# Altium PCB PCB.PcbDoc (part 2 of 6)
Units mm, origin at the board's own origin, x right, y up, seen from the top; angles counter-clockwise.
Board outline 56.61 x 57.68 mm, 2 copper layers (Top Layer, Bottom Layer), stack 0.572 mm thick; 104 components, 100 nets, 551 pads, 332 vias.
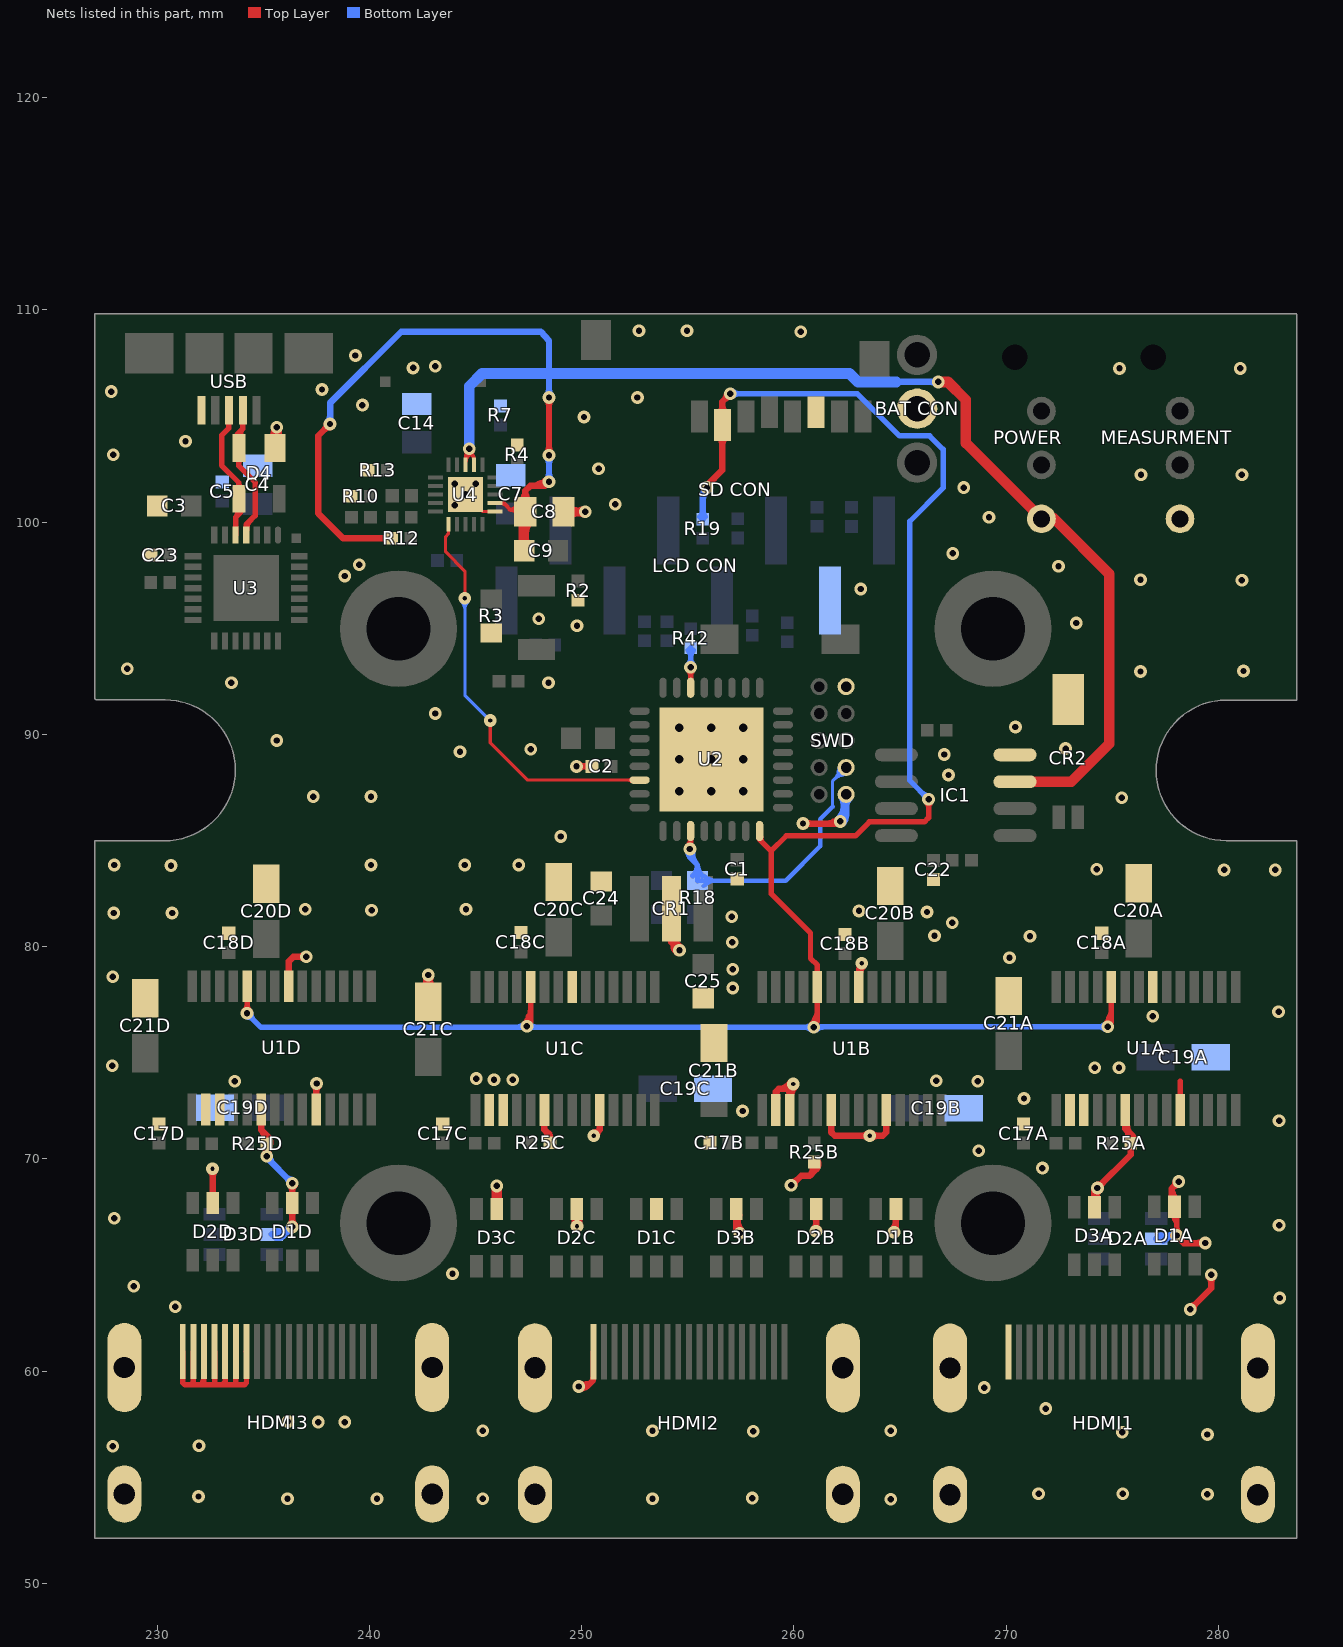
[diagram p2: the nets of this part, all layers, seen from the top]

## Via types
v1: diameter 0.6, hole 0.3, Top Layer to Bottom Layer, tented both sides, 242 vias
v2: diameter 0.6, hole 0.2, Top Layer to Bottom Layer, tented both sides, 80 vias
v3: diameter 0.8, hole 0.4, Top Layer to Bottom Layer, tented both sides, 9 vias
v4: diameter 0.66, hole 0.33, Top Layer to Bottom Layer, tented both sides, 1 vias

## Nets (pads, with @x,y where several pads share a name; then routed paths per layer and width w, separated by ;. In a path a pad name is that pad's centre, name@x,y a point inside that pad or via, vN(x,y) a via of type N, cw(c..) or ccw(c..) an arc to the next point about the centre after c; other vN are vias at no path point) (continued)
BAT: C8.1 C9.1 IC1.3 POWER.2 R12.1 U4.2 U4.7 U4.8 | length 113.4
  Top Layer w0.152: U4.8@244.525,102.7 244.525,103.124 ; 244.891,103.06 ccw(c245.026,103.074) U4.7@244.94,102.968 ; U4.7@244.925,102.7 244.925,103.08 ; 244.525,103.124 ccw(c244.428,103.221) 244.533,103.309 cw(c244.428,103.221) 244.525,103.124 ; 244.525,103.124 244.577,103.175 ; v1@244.525,103.319 cw(c244.375,103.204) 244.539,103.109 ; v1@244.525,103.319 cw(c244.375,103.204) 244.539,103.109 ; v1@244.525,103.319 cw(c244.375,103.204) 244.539,103.109 ; 244.539,103.109 cw(c244.753,102.985) v1@244.727,103.232 ; 244.539,103.109 cw(c244.753,102.985) v1@244.727,103.232 ; 244.539,103.109 cw(c244.753,102.985) v1@244.727,103.232 ; 244.577,103.175 ccw(c244.703,103.048) 244.546,102.961 cw(c244.703,103.048) 244.577,103.175 ; 244.577,103.175 244.831,103.175 ; v1@244.663,103.234 cw(c244.604,102.911) 244.888,103.075 ; v1@244.663,103.234 cw(c244.604,102.911) 244.888,103.075 ; v1@244.663,103.234 cw(c244.604,102.911) 244.888,103.075 ; 244.831,103.175 cw(c244.65,102.995) 244.902,102.954 ccw(c244.65,102.995) 244.831,103.175 ; 244.831,103.175 244.925,103.08 ; 244.888,103.075 cw(c245.105,103.201) v1@244.893,103.335 ; 244.888,103.075 cw(c245.105,103.201) v1@244.893,103.335 ; 244.888,103.075 cw(c245.105,103.201) v1@244.893,103.335 ; 244.925,103.08 cw(c245.074,103.228) 244.895,103.338 ccw(c245.074,103.228) 244.925,103.08 ; U4.8@244.525,102.679 cw(c245.25,102.679) 244.832,103.271 ccw(c245.25,102.679) U4.8@244.525,102.679 ; U4.8@244.525,102.973 cw(c245.043,102.973) 244.745,103.396 ccw(c245.043,102.973) U4.8@244.525,102.973
  Top Layer w0.2: U4.2@245.925,100.9 246.332,100.9 246.528,100.705 246.528,100.69 246.634,100.584 ; C8.1@247.345,100.482 247.244,100.584 246.634,100.584 ; 246.634,100.584 ccw(c246.634,100.916) 246.946,100.802 cw(c246.634,100.916) 246.634,100.584 ; 246.634,100.584 cw(c246.634,100.114) 247.008,100.399 ccw(c246.634,100.114) 246.634,100.584 ; U4.2@246.175,100.9 cw(c246.175,100.521) 246.443,100.789 ccw(c246.175,100.521) U4.2@246.175,100.9
  Top Layer w0.203: 244.577,103.175 244.653,103.251 244.653,103.403 v1(244.704,103.454)
  Top Layer w0.305: v1(238.15,104.623) 237.592,104.064 237.592,100.406 238.76,99.238 R12.1@241.053,99.238 ; C8.1@247.345,100.482 247.345,101.473 ; 247.959,101.779 cw(c248.173,101.408) v1@248.388,101.777 ; v1(248.463,101.905) 248.26,101.702 247.574,101.702 247.345,101.473 ; v1(248.463,103.149) v1(248.463,105.867) ; 237.898,104.371 ccw(c237.646,104.623) 238.003,104.623 cw(c237.646,104.623) 237.898,104.371 ; 237.898,104.371 cw(c238.15,104.119) 238.15,104.475 ccw(c238.15,104.119) 237.898,104.371 ; 240.697,99.238 ccw(c240.697,99.594) 240.949,99.342 cw(c240.697,99.594) 240.697,99.238 ; 240.697,99.238 cw(c240.697,98.881) 240.949,99.133 ccw(c240.697,98.881) 240.697,99.238 ; 247.345,101.473 ccw(c248.051,101.473) 247.589,100.939 cw(c248.051,101.473) 247.345,101.473 ; 247.345,101.473 cw(c246.639,101.473) 247.101,100.939 ccw(c246.639,101.473) 247.345,101.473 ; 248.463,103.506 ccw(c248.819,103.506) 248.567,103.254 cw(c248.819,103.506) 248.463,103.506 ; 248.463,103.506 cw(c248.106,103.506) 248.358,103.254 ccw(c248.106,103.506) 248.463,103.506 ; 248.463,105.511 ccw(c248.106,105.511) 248.358,105.763 cw(c248.106,105.511) 248.463,105.511 ; 248.463,105.511 cw(c248.819,105.511) 248.567,105.763 ccw(c248.819,105.511) 248.463,105.511 ; 247.616,101.702 ccw(c247.616,102.752) 248.358,102.009 cw(c247.616,102.752) 247.616,101.702
  Top Layer w0.508: C9.1@247.269,98.844 C8.1@247.269,100.482 ; v1(266.802,106.604) 267.259,106.604 268.097,105.766 268.097,103.733 271.65,100.18 272.235,100.18 274.853,97.561 274.853,89.56 273.063,87.77 IC1.3@270.413,87.77 ; 247.269,99.273 ccw(c247.889,99.273) 247.451,98.835 cw(c247.889,99.273) 247.269,99.273 ; 247.269,99.469 cw(c248.183,99.469) 247.537,100.116 ccw(c248.183,99.469) 247.269,99.469
  Bottom Layer w0.305: v1(238.15,104.623) 238.15,105.613 241.503,108.966 248.082,108.966 248.463,108.534 248.463,107.005 v1(248.463,105.867) ; v1(248.463,101.905) v1(248.463,103.149) ; 264.82,106.604 v1(266.802,106.604) ; 238.15,104.979 ccw(c238.507,104.979) 238.255,104.727 cw(c238.507,104.979) 238.15,104.979 ; 238.15,104.979 cw(c237.794,104.979) 238.046,104.727 ccw(c237.794,104.979) 238.15,104.979 ; 248.463,102.261 ccw(c248.819,102.261) 248.567,102.009 cw(c248.819,102.261) 248.463,102.261 ; 248.463,102.261 cw(c248.106,102.261) 248.358,102.009 ccw(c248.106,102.261) 248.463,102.261 ; 248.463,102.793 ccw(c248.106,102.793) 248.358,103.045 cw(c248.106,102.793) 248.463,102.793 ; 248.463,102.793 cw(c248.819,102.793) 248.567,103.045 ccw(c248.819,102.793) 248.463,102.793 ; 248.463,106.224 ccw(c248.819,106.224) 248.567,105.972 cw(c248.819,106.224) 248.463,106.224 ; 248.463,106.224 cw(c248.106,106.224) 248.358,105.972 ccw(c248.106,106.224) 248.463,106.224 ; 266.445,106.604 ccw(c266.445,106.96) 266.697,106.708 cw(c266.445,106.96) 266.445,106.604 ; 266.445,106.604 cw(c266.445,106.247) 266.697,106.499 ccw(c266.445,106.247) 266.445,106.604
  Bottom Layer w0.508: v1(244.704,103.454) 244.704,106.401 245.308,107.005 248.463,107.005 262.615,107.005 263.017,106.604 264.82,106.604
BOOT_SEL: R18.2 SWD.8 U2.3 | length 29.4
  Top Layer w0.254: v1(255.099,84.6) 255.099,84.665 255.133,84.699 U2.3@255.133,85.449 ; v1@254.977,84.722 ccw(c254.6,85.099) 255.133,85.099 cw(c254.6,85.099) v1@254.977,84.722 ; 255.133,84.936 ccw(c255.436,84.936) 255.222,84.722 cw(c255.436,84.936) 255.133,84.936
  Bottom Layer w0.152: 261.823,86.589 261.823,87.808 SWD.8@262.458,88.443 ; 262.017,88.005 cw(c262.579,87.855) SWD.8@262.462,88.424 ; 262.021,88.002 ccw(c261.87,88.563) SWD.8@262.44,88.447 ; 262.081,88.243 cw(c262.523,88.125) SWD.8@262.431,88.573 ; 262.259,88.066 ccw(c262.14,88.508) SWD.8@262.589,88.416 ; 261.905,87.89 ccw(c261.353,88.443) 262.134,88.443 cw(c261.353,88.443) 261.905,87.89 ; 261.905,87.89 cw(c262.458,87.337) 262.458,88.119 ccw(c262.458,87.337) 261.905,87.89 ; 262.166,88.15 ccw(c261.873,88.443) 262.287,88.443 cw(c261.873,88.443) 262.166,88.15 ; 262.166,88.15 cw(c262.458,87.858) 262.458,88.271 ccw(c262.458,87.858) 262.166,88.15
  Bottom Layer w0.203: R18.2@255.46,83.11 259.41,83.11 ; 259.513,83.11 259.41,83.11 ; 261.823,86.589 261.234,86 261.234,84.73 259.614,83.11 259.41,83.11 ; 256.351,83.11 ccw(c256.351,82.268) 255.756,82.863 cw(c256.351,82.268) 256.351,83.11 ; 256.351,83.11 cw(c256.351,83.951) 255.756,83.356 ccw(c256.351,83.951) 256.351,83.11
  Bottom Layer w0.254: v1(255.099,84.6) 255.099,84.665 255.118,84.684 255.118,84.188 ; R18.2@255.46,83.11 255.46,83.845 ; 255.118,84.187 ccw(c254.75,84.187) 254.988,84.468 cw(c254.75,84.187) 255.118,84.187 ; 255.118,84.188 255.46,83.845 ; 255.46,83.845 ccw(c256.136,83.845) 255.678,83.347 cw(c256.136,83.845) 255.46,83.845 ; 255.46,83.845 cw(c254.783,83.845) 255.241,83.347 ccw(c254.783,83.845) 255.46,83.845 ; 255.46,83.845 cw(c255.983,84.369) 255.267,84.556 ccw(c255.983,84.369) 255.46,83.845 ; v1@255.021,84.62 ccw(c255.486,84.499) 255.146,84.159 cw(c255.486,84.499) v1@255.021,84.62 ; 255.118,84.226 cw(c255.473,84.226) 255.222,84.478 ccw(c255.473,84.226) 255.118,84.226
CS: "SD CON.2" R19.2 U1A.24 U1B.24 U1C.24 U1D.24 U2.8 | length 133.4
  Top Layer w0.254: v1@234.25,76.849 U1D.24@234.25,78.139 ; v1(247.421,76.251) 247.6,76.43 U1C.24@247.6,78.1 ; 247.517,76.751 ccw(c247.809,76.582) v1@247.553,76.363 ; U2.8@258.359,85.107 cw(c258.222,84.87) 258.487,84.941 ; U2.8@258.383,85.449 258.383,85.05 258.928,84.506 ; v1(260.934,76.2) 260.934,76.378 261.1,76.544 ; 261.019,76.68 ccw(c261.283,76.528) v1@261.06,76.318 ; 266.319,86.055 266.141,85.877 263.55,85.877 262.89,85.217 259.639,85.217 258.928,84.506 ; 266.344,86.081 v1(266.344,86.944) ; v1(274.777,76.225) 274.956,76.429 U1A.24@274.956,78.109 ; 274.872,76.724 ccw(c275.163,76.557) v1@274.908,76.338 ; 234.25,77.378 ccw(c234.014,77.378) 234.181,77.545 cw(c234.014,77.378) 234.25,77.378 ; 234.25,77.378 cw(c234.487,77.378) 234.32,77.545 ccw(c234.487,77.378) 234.25,77.378 ; 247.6,77.338 ccw(c247.364,77.338) 247.531,77.506 cw(c247.364,77.338) 247.6,77.338 ; 247.6,77.338 cw(c247.837,77.338) 247.67,77.506 ccw(c247.837,77.338) 247.6,77.338 ; 258.928,84.506 258.928,82.499 260.782,80.645 260.782,79.451 261.1,79.133 U1B.24@261.1,78.1 261.1,76.544 ; 261.1,76.544 ccw(c261.238,76.407) 261.077,76.297 cw(c261.238,76.407) 261.1,76.544 ; 261.1,76.544 cw(c260.929,76.544) 260.932,76.373 ccw(c260.929,76.544) 261.1,76.544 ; 261.1,77.338 ccw(c260.864,77.338) 261.031,77.506 cw(c260.864,77.338) 261.1,77.338 ; 261.1,77.338 cw(c261.337,77.338) 261.17,77.506 ccw(c261.337,77.338) 261.1,77.338 ; 261.1,78.862 ccw(c261.337,78.862) 261.17,78.694 cw(c261.337,78.862) 261.1,78.862 ; 261.1,78.862 cw(c260.864,78.862) 261.031,78.694 ccw(c260.864,78.862) 261.1,78.862 ; 266.344,86.527 ccw(c265.927,86.527) 266.222,86.822 cw(c265.927,86.527) 266.344,86.527 ; 266.344,86.527 cw(c266.762,86.527) 266.467,86.822 ccw(c266.762,86.527) 266.344,86.527 ; 274.956,77.348 ccw(c274.719,77.348) 274.886,77.515 cw(c274.719,77.348) 274.956,77.348 ; 274.956,77.348 cw(c275.192,77.348) 275.025,77.515 ccw(c275.192,77.348) 274.956,77.348 ; v1@234.116,76.983 ccw(c233.793,77.306) 234.25,77.306 cw(c233.793,77.306) v1@234.116,76.983 ; 234.25,77.25 ccw(c234.628,77.25) 234.361,76.983 cw(c234.628,77.25) 234.25,77.25 ; v1@247.299,76.373 ccw(c246.572,77.101) 247.6,77.101 cw(c246.572,77.101) v1@247.299,76.373 ; U2.8@258.431,85.149 ccw(c258.785,85.149) 258.535,84.899 cw(c258.785,85.149) U2.8@258.431,85.149 ; v1@260.812,76.322 ccw(c260.115,77.019) 261.1,77.019 cw(c260.115,77.019) v1@260.812,76.322 ; v1@274.655,76.348 ccw(c273.929,77.074) 274.956,77.074 cw(c273.929,77.074) v1@274.655,76.348
  Top Layer w0.305: v1(255.905,101.625) 255.905,101.727 256.616,102.438 256.616,104.445 256.625,104.454 256.625,105.673 v1(256.997,106.045) ; 256.745,105.793 ccw(c256.493,106.045) 256.85,106.045 cw(c256.493,106.045) 256.745,105.793 ; 256.745,105.793 cw(c256.997,105.541) 256.997,105.897 ccw(c256.997,105.541) 256.745,105.793 ; 256.469,104.053 cw(c256.112,103.697) 256.616,103.697 ccw(c256.112,103.697) 256.469,104.053 ; 256.469,105.103 ccw(c256.09,105.482) 256.625,105.482 cw(c256.09,105.482) 256.469,105.103 ; 256.616,103.564 cw(c257.308,103.564) 256.819,104.053 ccw(c257.308,103.564) 256.616,103.564 ; 256.625,105.57 ccw(c257.285,105.57) 256.819,105.103 cw(c257.285,105.57) 256.625,105.57
  Bottom Layer w0.254: v1(234.239,76.86) 234.899,76.2 247.371,76.2 v1@247.391,76.221 ; v1(247.421,76.251) 247.472,76.2 v1(260.934,76.2) ; v1(256.997,106.045) 262.992,106.045 264.973,104.064 266.395,104.064 267.029,103.43 267.029,101.607 265.455,100.033 265.455,87.833 v1(266.344,86.944) ; v1@260.934,76.221 274.269,76.221 ; 274.117,76.221 274.772,76.221 v1(274.777,76.225) ; 234.534,76.565 ccw(c234.239,76.27) 234.239,76.687 cw(c234.239,76.27) 234.534,76.565 ; 234.534,76.565 cw(c234.829,76.86) 234.412,76.86 ccw(c234.829,76.86) 234.534,76.565 ; 257.415,106.045 ccw(c257.415,105.627) 257.12,105.923 cw(c257.415,105.627) 257.415,106.045 ; 257.415,106.045 cw(c257.415,106.463) 257.12,106.167 ccw(c257.415,106.463) 257.415,106.045 ; 260.517,76.2 ccw(c260.517,76.618) 260.812,76.322 cw(c260.517,76.618) 260.517,76.2 ; 260.517,76.2 cw(c260.517,75.782) 260.812,76.078 ccw(c260.517,75.782) 260.517,76.2 ; 266.049,87.24 ccw(c266.344,87.535) 266.344,87.117 cw(c266.344,87.535) 266.049,87.24 ; 266.049,87.24 cw(c265.754,86.944) 266.171,86.944 ccw(c265.754,86.944) 266.049,87.24 ; 246.881,76.2 ccw(c246.881,76.791) 247.299,76.373 cw(c246.881,76.791) 246.881,76.2 ; v1@247.544,76.373 ccw(c247.962,76.791) 247.962,76.2 cw(c247.962,76.791) v1@247.544,76.373 ; v1@261.057,76.078 cw(c261.402,75.733) 261.402,76.221 ccw(c261.402,75.733) v1@261.057,76.078 ; v1@261.057,76.322 ccw(c261.302,76.568) 261.302,76.221 cw(c261.302,76.568) v1@261.057,76.322 ; 274.348,76.221 ccw(c274.348,76.655) 274.655,76.348 cw(c274.348,76.655) 274.348,76.221 ; 274.371,76.221 cw(c274.371,75.819) 274.655,76.103 ccw(c274.371,75.819) 274.371,76.221
  Bottom Layer w0.305: R19.2@255.7,100.14 R19.2@255.702,100.138 255.702,101.166 ; 255.7,101.016 255.7,101.319 ; 255.778,101.275 ccw(c255.629,101.411) v1@255.788,101.535 ; v1(255.905,101.625) 255.905,101.524 255.7,101.319 ; 255.7,101.319 ccw(c255.516,101.503) 255.764,101.581 cw(c255.516,101.503) 255.7,101.319 ; 255.702,100.494 ccw(c256.058,100.494) 255.806,100.242 cw(c256.058,100.494) 255.702,100.494 ; 255.702,100.494 cw(c255.345,100.494) 255.597,100.242 ccw(c255.345,100.494) 255.702,100.494 ; 255.7,100.982 cw(c256.315,100.982) 255.984,101.501 ccw(c256.315,100.982) 255.7,100.982 ; 255.7,101.257 cw(c255.922,101.257) 255.912,101.478 ccw(c255.922,101.257) 255.7,101.257
D/C: R42.1 U2.22 | length 8.3
  Top Layer w0.254: U2.22@255.133,92.199 255.133,93.04 v1(255.133,93.163) ; 255.133,92.745 ccw(c254.716,92.745) 255.011,93.04 cw(c254.716,92.745) 255.133,92.745 ; 255.133,92.745 cw(c255.551,92.745) 255.256,93.04 ccw(c255.551,92.745) 255.133,92.745
  Bottom Layer w0.254: v1(255.133,93.163) 255.133,93.665 ; R42.1@255.143,94.082 255.143,93.675 ; R42.1@255.021,93.959 cw(c254.749,93.688) 255.133,93.688 ; R42.1@255.021,93.959 cw(c254.749,93.688) 255.133,93.688 ; R42.1@255.021,93.959 cw(c254.749,93.688) 255.133,93.688 ; R42.1@255.021,93.959 cw(c254.749,93.688) 255.133,93.688 ; 255.133,93.58 ccw(c255.551,93.58) 255.256,93.285 cw(c255.551,93.58) 255.133,93.58 ; 255.133,93.58 cw(c254.716,93.58) 255.011,93.285 ccw(c254.716,93.58) 255.133,93.58 ; 255.133,93.665 cw(c255.526,93.665) 255.26,93.954 ccw(c255.526,93.665) 255.133,93.665 ; 255.133,93.665 255.143,93.675 ; 255.143,93.675 ccw(c254.752,93.675) 255.023,93.957 cw(c254.752,93.675) 255.143,93.675 ; 255.143,93.675 cw(c255.534,93.675) 255.263,93.957 ccw(c255.534,93.675) 255.143,93.675 ; 255.133,93.64 cw(c255.584,93.64) 255.265,93.959 ccw(c255.584,93.64) 255.133,93.64
DM: D4.3 U3.5 USB.3 | length 10.4
  Top Layer w0.254: USB.3@233.38,105.264 233.38,104.424 233.045,104.089 233.045,102.667 233.858,101.854 ; U3.5@233.699,99.389 233.701,99.391 233.701,100.224 ; 233.701,100.224 ccw(c233.483,100.441) 233.723,100.634 cw(c233.483,100.441) 233.701,100.224 ; 233.701,100.224 233.858,100.381 ; 233.858,100.381 ccw(c233.567,100.381) 233.749,100.607 cw(c233.567,100.381) 233.858,100.381 ; 233.858,100.381 cw(c234.148,100.381) 233.966,100.607 ccw(c234.148,100.381) 233.858,100.381 ; 233.858,100.381 D4.3@233.858,101.092 233.858,101.854 ; 233.858,101.854 ccw(c234.262,101.854) 233.979,101.566 cw(c234.262,101.854) 233.858,101.854 ; 233.858,101.854 cw(c233.454,101.854) 233.737,101.566 ccw(c233.454,101.854) 233.858,101.854 ; 233.901,100.424 ccw(c233.705,100.619) 233.921,100.793 cw(c233.705,100.619) 233.901,100.424
DP: D4.2 U3.4 USB.2 | length 11.7
  Top Layer w0.254: USB.2@234.041,105.275 234.036,105.269 234.036,104.394 ; U3.4@234.199,99.389 234.199,99.883 234.62,100.305 234.62,101.879 233.858,102.641 D4.2@233.858,103.492 233.858,104.216 ; 233.858,102.724 ccw(c233.44,102.724) 233.735,103.02 cw(c233.44,102.724) 233.858,102.724 ; 233.858,102.724 cw(c234.275,102.724) 233.98,103.02 ccw(c234.275,102.724) 233.858,102.724 ; 233.858,104.216 ccw(c234.176,104.216) 233.97,103.974 cw(c234.176,104.216) 233.858,104.216 ; 233.858,104.216 cw(c233.54,104.216) 233.746,103.974 ccw(c233.54,104.216) 233.858,104.216 ; 233.858,104.216 234.036,104.394 ; 234.036,104.394 ccw(c234.283,104.146) 233.998,103.943 cw(c234.283,104.146) 234.036,104.394 ; D4.2@233.792,103.795 cw(c234.036,103.97) 233.824,104.182 ccw(c234.036,103.97) D4.2@233.792,103.795 ; U3.4@234.222,99.639 cw(c234.867,99.639) 234.411,100.095 ccw(c234.867,99.639) U3.4@234.222,99.639
GND: "BAT CON.2" "LCD CON.2" "SD CON.6" C1.1 C2.1 C3.2 C4.1 C5.2 C7.2 C8.2 C14.2 C17A.1 C17B.1 C17C.1 C17D.1 C18A.1 C18B.1 C18C.1 C18D.1 C19A.2 C19B.2 C19C.2 C19D.2 C20A.2 C20B.2 C20C.2 C20D.2 C21A.2 C21B.2 C21C.2 C21D.2 C22.2 C23.2 C24.1 C25.1 CR1.2 CR2.3 D1A.2 D1B.2 D1C.2 D1D.2 D2A.2 D2B.2 D2C.2 D2D.2 D3A.2 D3B.2 D3C.2 D3D.2 D4.1 HDMI1.19 HDMI1.20 HDMI1.21 HDMI1.22 HDMI1.23 HDMI2.19 HDMI2.20 HDMI2.21 HDMI2.22 HDMI2.23 HDMI3.13 HDMI3.14 HDMI3.15 HDMI3.16 HDMI3.17 HDMI3.18 HDMI3.19 HDMI3.20 HDMI3.21 HDMI3.22 HDMI3.23 IC1.4 MEASURMENT.2 R2.1 R3.1 R4.1 R7.1 R10.2 R13.1 R25A.1 R25B.1 R25C.1 R25D.1 SWD.2 SWD.10 U1A.2 U1A.3 U1A.6 U1A.10 U1A.21 U1B.2 U1B.3 U1B.6 U1B.10 U1B.21 U1C.2 U1C.3 U1C.6 U1C.10 U1C.21 U1D.2 U1D.3 U1D.6 U1D.10 U1D.21 U2.33 U4.1 U4.21 USB.5 | length 223.8
  Top Layer w0.152: U4.21@244.475,101.29 ccw(c244.87,101.37) U4.21@244.765,100.982 ; v4(244.525,101.3) 245.325,100.5 U4.1@245.925,100.5 ; U4.21@244.536,101.35 cw(c244.455,100.956) U4.21@244.844,101.06 ; U4.21@244.959,100.867 ccw(c244.525,100.433) 244.525,101.046 cw(c244.525,100.433) U4.21@244.959,100.867 ; U4.21@244.959,100.867 cw(c245.392,101.3) 244.779,101.3 ccw(c245.392,101.3) U4.21@244.959,100.867
  Top Layer w0.2: U1B.6@261.75,72.139 U1B.6@261.75,72.3
  Top Layer w0.254: HDMI3.19@231.211,60.935 231.211,59.467 231.318,59.36 231.572,59.36 ; HDMI3.18@231.711,60.935 231.711,59.499 231.572,59.36 ; HDMI3.17@232.211,60.935 232.211,59.516 232.054,59.36 ; HDMI3.16@232.711,60.935 232.715,60.93 232.715,59.436 232.639,59.36 ; HDMI3.15@233.223,60.922 HDMI3.15@233.211,60.935 233.211,59.5 233.07,59.36 ; 233.711,59.416 HDMI3.14@233.711,60.935 ; HDMI3.13@234.211,60.935 234.213,60.932 234.213,59.461 234.112,59.36 233.07,59.36 ; C8.2@249.145,100.482 v1(250.165,100.482) ; v1(249.86,59.284) 250.266,59.284 ; HDMI2.19@250.552,60.924 250.552,59.57 ; U1B.21@263.001,78.71 ccw(c262.809,79.044) v2@263.181,78.944 ; U1B.21@263.05,78.1 263.05,78.951 263.246,79.146 263.195,79.197 v2(263.195,79.223) ; v2@263.078,79.095 cw(c262.936,78.94) U1B.21@263.118,78.835 ; v2@263.079,79.094 cw(c262.908,78.904) U1B.21@263.13,78.776 ; 277.954,67.139 cw(c278.102,67.225) D1A.2@278.015,67.372 ; v1@278.028,66.4 D1A.2@278.028,67.644 ; U1A.10@278.206,72.309 278.206,73.659 ; 231.572,59.36 232.054,59.36 ; 232.054,59.36 ccw(c231.7,59.714) 232.198,59.773 cw(c231.7,59.714) 232.054,59.36 ; 232.054,59.36 232.639,59.36 ; 232.639,59.36 233.07,59.36 ; 249.722,100.379 cw(c249.843,99.926) v1@250.078,100.333 ; 249.722,100.379 cw(c249.843,99.926) v1@250.078,100.333 ; 249.722,100.379 cw(c249.843,99.926) v1@250.078,100.333 ; 249.722,100.585 ccw(c249.843,101.039) v1@250.078,100.632 ; 249.722,100.585 ccw(c249.843,101.039) v1@250.078,100.632 ; 249.722,100.585 ccw(c249.843,101.039) v1@250.078,100.632 ; 249.747,100.482 ccw(c249.747,100.9) 250.042,100.605 cw(c249.747,100.9) 249.747,100.482 ; 249.747,100.482 cw(c249.747,100.065) 250.042,100.36 ccw(c249.747,100.065) 249.747,100.482 ; 249.793,100.398 ccw(c249.698,100.752) v1@250.015,100.569 ; 249.793,100.398 ccw(c249.698,100.752) v1@250.015,100.569 ; 249.793,100.398 ccw(c249.698,100.752) v1@250.015,100.569 ; 249.793,100.566 cw(c249.698,100.213) v1@250.015,100.396 ; 249.793,100.566 cw(c249.698,100.213) v1@250.015,100.396 ; 249.793,100.566 cw(c249.698,100.213) v1@250.015,100.396 ; v1@250.106,100.482 ccw(c250.106,99.522) 249.427,100.201 cw(c250.106,99.522) v1@250.106,100.482 ; v1@250.106,100.482 cw(c250.106,101.443) 249.427,100.764 ccw(c250.106,101.443) v1@250.106,100.482 ; 250.266,59.284 ccw(c250.266,58.893) 249.984,59.164 cw(c250.266,58.893) 250.266,59.284 ; 250.266,59.284 cw(c250.266,59.674) 249.984,59.404 ccw(c250.266,59.674) 250.266,59.284 ; 250.266,59.284 250.552,59.57 ; 250.552,59.57 cw(c250.144,59.978) 249.925,59.444 ccw(c250.144,59.978) 250.552,59.57 ; 263.05,78.862 ccw(c263.287,78.862) 263.12,78.694 cw(c263.287,78.862) 263.05,78.862 ; 263.05,78.862 cw(c262.814,78.862) 262.981,78.694 ccw(c262.814,78.862) 263.05,78.862 ; 278.028,66.813 ccw(c278.446,66.813) 278.151,66.518 cw(c278.446,66.813) 278.028,66.813 ; 278.028,66.813 cw(c277.611,66.813) 277.906,66.518 ccw(c277.611,66.813) 278.028,66.813 ; 278.206,73.071 ccw(c278.442,73.071) 278.275,72.904 cw(c278.442,73.071) 278.206,73.071 ; 278.206,73.071 cw(c277.969,73.071) 278.136,72.904 ccw(c277.969,73.071) 278.206,73.071 ; v1@249.829,59.209 ccw(c249.987,59.595) 250.282,59.3 cw(c249.987,59.595) v1@249.829,59.209 ; 250.393,59.411 ccw(c250.04,59.764) 250.539,59.764 cw(c250.04,59.764) 250.393,59.411 ; U1B.21@263.05,78.456 cw(c263.961,78.456) 263.317,79.1 ccw(c263.961,78.456) U1B.21@263.05,78.456 ; D1A.2@277.804,67.398 cw(c277.264,66.858) 278.028,66.858 ccw(c277.264,66.858) D1A.2@277.804,67.398
  Top Layer w0.305: v2(232.613,69.545) 232.639,69.52 232.639,69.291 232.628,69.281 D2D.2@232.628,67.927 ; U1D.6@234.9,72.339 234.9,71.373 ; v1@235.068,70.241 ccw(c234.847,70.498) R25D.1@235.185,70.498 ; R25D.1@235.077,70.595 cw(c234.972,70.452) v1@235.143,70.406 ; R25D.1@235.139,70.714 235.139,71.134 234.9,71.373 ; R25D.1@235.143,70.434 cw(c234.859,70.434) v1@235.06,70.234 ; R25D.1@235.143,70.498 ccw(c235.482,70.498) v1@235.261,70.241 ; v1(235.164,70.129) v1@235.164,70.307 ; v1@235.164,70.144 v1@235.164,70.307 ; R25D.1@235.164,70.714 v1@235.164,70.307 ; v1@235.185,70.406 cw(c235.356,70.452) R25D.1@235.252,70.595 ; R25D.1@235.185,70.434 ccw(c235.469,70.434) v1@235.269,70.234 ; U1D.21@236.2,78.139 236.2,79.305 236.423,79.527 v1(237.033,79.527) ; v1(236.372,66.802) D1D.2@236.372,67.644 ; D1D.2@236.372,67.923 v1(236.372,68.859) ; U1D.10@237.5,72.339 237.5,73.467 237.515,73.482 v1(237.515,73.558) ; C21C.2@242.773,77.403 v1(242.773,78.664) ; U1C.6@248.25,72.3 248.25,71.383 ; 248.4,71.103 ccw(c248.578,71.083) R25C.1@248.539,70.908 ; R25C.1@248.506,70.764 248.506,71.127 248.25,71.383 ; v1(249.758,88.494) C2.1@250.484,88.494 ; v2(250.571,71.095) 250.85,71.374 U1C.10@250.85,72.3 ; CR1.2@254.229,81.788 254.229,80.213 ; D3B.2@257.277,67.655 257.277,66.675 v1(257.454,66.497) ; v1@257.334,66.582 ccw(c257.044,66.785) 257.351,66.962 ; 257.364,66.957 cw(c257.854,67.088) D3B.2@257.415,67.341 ; U1B.2@259.15,72.3 259.15,73.172 259.283,73.304 ; 259.6,73.388 cw(c259.758,73.216) v2@259.887,73.41 ; U1B.3@259.8,72.3 259.8,73.194 ; v2@259.851,73.444 cw(c259.589,73.246) 259.873,73.082 ; v1(259.867,68.758) 259.893,68.758 260.35,69.215 260.756,69.215 ; v2(259.969,73.533) 259.8,73.364 259.8,73.194 ; v1(260.426,85.801) 262.077,85.801 v1(262.179,85.903) ; R25B.1@260.96,69.857 260.96,69.418 260.756,69.215 ; v2(261.036,66.599) 261.046,66.609 D2B.2@261.046,67.64 ; U1B.6@261.75,72.3 261.75,71.269 261.925,71.095 v2(263.576,71.095) 264.185,71.095 264.35,71.26 U1B.10@264.35,72.3 ; 261.83,85.866 cw(c261.917,85.716) v1@262.059,85.817 ; v2(264.719,66.548) 264.795,66.624 D1B.2@264.795,67.625 ; D3A.2@274.084,68.077 ccw(c273.903,68.39) 274.252,68.296 ; D3A.2@274.157,67.724 274.157,68.494 v1(274.295,68.631) 275.862,70.198 R25A.1@275.862,70.739 275.862,71.178 ; v1@274.189,68.528 cw(c274.01,68.353) D3A.2@274.227,68.228 ; 274.25,68.289 ccw(c274.589,68.198) D3A.2@274.285,68.023 ; U1A.6@275.559,71.729 cw(c275.29,71.413) 275.703,71.447 ; U1A.6@275.606,72.309 275.606,71.435 ; v1@277.876,66.396 278.004,66.396 278.36,66.04 v1(279.375,66.04) ; v1@277.982,68.936 cw(c277.626,68.936) 277.878,68.684 cw(c278.13,68.432) v1@278.13,68.788 ; D1A.2@278,67.751 277.8,67.951 277.8,68.606 ; D1A.2@278.028,68.078 cw(c278.524,68.606) 277.8,68.606 ; v1(278.13,68.936) 277.8,68.606 ; v1(278.663,62.916) 279.654,63.906 v1(279.654,64.541) ; 232.628,68.509 ccw(c232.985,68.509) 232.733,68.257 cw(c232.985,68.509) 232.628,68.509 ; 232.628,68.509 cw(c232.272,68.509) 232.524,68.257 ccw(c232.272,68.509) 232.628,68.509 ; 234.9,71.373 cw(c234.501,70.974) 235.027,70.767 ccw(c234.501,70.974) 234.9,71.373 ; v1@235.06,70.234 ccw(c234.808,70.486) R25D.1@235.164,70.486 ; v1@235.06,70.234 ccw(c234.808,70.486) R25D.1@235.164,70.486 ; R25D.1@235.06,70.609 cw(c234.808,70.357) v1@235.164,70.357 ; R25D.1@235.06,70.609 cw(c234.808,70.357) v1@235.164,70.357 ; R25D.1@235.06,70.609 cw(c234.808,70.357) v1@235.164,70.357 ; R25D.1@235.06,70.609 cw(c234.808,70.357) v1@235.164,70.357 ; R25D.1@235.06,70.609 cw(c234.808,70.357) v1@235.164,70.357 ; R25D.1@235.06,70.609 cw(c234.808,70.357) v1@235.164,70.357 ; R25D.1@235.06,70.609 cw(c234.808,70.357) v1@235.164,70.357 ; R25D.1@235.06,70.609 cw(c234.808,70.357) v1@235.164,70.357 ; R25D.1@235.06,70.609 cw(c234.808,70.357) v1@235.164,70.357 ; R25D.1@235.06,70.609 cw(c234.808,70.357) v1@235.164,70.357 ; R25D.1@235.06,70.609 cw(c234.859,70.409) v1@235.143,70.409 ; R25D.1@235.06,70.609 cw(c234.859,70.409) v1@235.143,70.409 ; R25D.1@235.06,70.609 cw(c234.859,70.409) v1@235.143,70.409 ; R25D.1@235.06,70.609 cw(c234.859,70.409) v1@235.143,70.409 ; R25D.1@235.06,70.609 cw(c234.859,70.409) v1@235.143,70.409 ; v1@235.063,70.237 ccw(c234.906,70.405) R25D.1@235.128,70.464 ; v1@235.063,70.237 ccw(c234.906,70.405) R25D.1@235.128,70.464 ; v1@235.063,70.237 ccw(c234.906,70.405) R25D.1@235.128,70.464 ; v1@235.063,70.237 ccw(c234.906,70.405) R25D.1@235.128,70.464 ; v1@235.063,70.237 ccw(c234.906,70.405) R25D.1@235.128,70.464 ; R25D.1@235.068,70.602 cw(c234.845,70.345) v1@235.185,70.345 ; R25D.1@235.068,70.602 cw(c234.845,70.345) v1@235.185,70.345 ; R25D.1@235.068,70.602 cw(c234.845,70.345) v1@235.185,70.345 ; R25D.1@235.068,70.602 cw(c234.845,70.345) v1@235.185,70.345 ; R25D.1@235.068,70.602 cw(c234.845,70.345) v1@235.185,70.345 ; v1@235.077,70.248 ccw(c234.972,70.391) R25D.1@235.143,70.437 ; v1@235.077,70.248 ccw(c234.972,70.391) R25D.1@235.143,70.437 ; v1@235.077,70.248 ccw(c234.972,70.391) R25D.1@235.143,70.437 ; v1@235.077,70.248 ccw(c234.972,70.391) R25D.1@235.143,70.437 ; v1@235.077,70.248 ccw(c234.972,70.391) R25D.1@235.143,70.437 ; v1@235.077,70.248 ccw(c234.972,70.391) R25D.1@235.143,70.437 ; v1@235.077,70.248 ccw(c234.972,70.391) R25D.1@235.143,70.437 ; v1@235.077,70.248 ccw(c234.972,70.391) R25D.1@235.143,70.437 ; v1@235.077,70.248 ccw(c234.972,70.391) R25D.1@235.143,70.437 ; v1@235.077,70.248 ccw(c234.972,70.391) R25D.1@235.143,70.437 ; v1@235.077,70.248 ccw(c234.972,70.391) R25D.1@235.143,70.437 ; v1@235.077,70.248 ccw(c234.972,70.391) R25D.1@235.143,70.437 ; v1@235.077,70.248 ccw(c234.972,70.391) R25D.1@235.143,70.437 ; v1@235.077,70.248 ccw(c234.972,70.391) R25D.1@235.143,70.437 ; v1@235.077,70.248 ccw(c234.972,70.391) R25D.1@235.143,70.437 ; v1@235.143,70.345 cw(c235.483,70.345) R25D.1@235.261,70.602 ; v1@235.143,70.345 cw(c235.483,70.345) R25D.1@235.261,70.602 ; v1@235.143,70.345 cw(c235.483,70.345) R25D.1@235.261,70.602 ; v1@235.143,70.345 cw(c235.483,70.345) R25D.1@235.261,70.602 ; v1@235.143,70.345 cw(c235.483,70.345) R25D.1@235.261,70.602 ; v1@235.164,70.357 cw(c235.521,70.357) R25D.1@235.269,70.609 ; v1@235.164,70.357 cw(c235.521,70.357) R25D.1@235.269,70.609 ; v1@235.164,70.357 cw(c235.521,70.357) R25D.1@235.269,70.609 ; v1@235.164,70.357 cw(c235.521,70.357) R25D.1@235.269,70.609 ; v1@235.164,70.357 cw(c235.521,70.357) R25D.1@235.269,70.609 ; v1@235.164,70.357 cw(c235.521,70.357) R25D.1@235.269,70.609 ; v1@235.164,70.357 cw(c235.521,70.357) R25D.1@235.269,70.609 ; v1@235.164,70.357 cw(c235.521,70.357) R25D.1@235.269,70.609 ; v1@235.164,70.357 cw(c235.521,70.357) R25D.1@235.269,70.609 ; v1@235.164,70.357 cw(c235.521,70.357) R25D.1@235.269,70.609 ; R25D.1@235.164,70.486 ccw(c235.521,70.486) v1@235.269,70.234 ; R25D.1@235.164,70.486 ccw(c235.521,70.486) v1@235.269,70.234 ; v1@235.185,70.409 cw(c235.469,70.409) R25D.1@235.269,70.609 ; v1@235.185,70.409 cw(c235.469,70.409) R25D.1@235.269,70.609 ; v1@235.185,70.409 cw(c235.469,70.409) R25D.1@235.269,70.609 ; v1@235.185,70.409 cw(c235.469,70.409) R25D.1@235.269,70.609 ; v1@235.185,70.409 cw(c235.469,70.409) R25D.1@235.269,70.609 ; R25D.1@235.185,70.437 ccw(c235.356,70.391) v1@235.252,70.248 ; R25D.1@235.185,70.437 ccw(c235.356,70.391) v1@235.252,70.248 ; R25D.1@235.185,70.437 ccw(c235.356,70.391) v1@235.252,70.248 ; R25D.1@235.185,70.437 ccw(c235.356,70.391) v1@235.252,70.248 ; R25D.1@235.185,70.437 ccw(c235.356,70.391) v1@235.252,70.248 ; R25D.1@235.185,70.437 ccw(c235.356,70.391) v1@235.252,70.248 ; R25D.1@235.185,70.437 ccw(c235.356,70.391) v1@235.252,70.248 ; R25D.1@235.185,70.437 ccw(c235.356,70.391) v1@235.252,70.248 ; R25D.1@235.185,70.437 ccw(c235.356,70.391) v1@235.252,70.248 ; R25D.1@235.185,70.437 ccw(c235.356,70.391) v1@235.252,70.248 ; R25D.1@235.185,70.437 ccw(c235.356,70.391) v1@235.252,70.248 ; R25D.1@235.185,70.437 ccw(c235.356,70.391) v1@235.252,70.248 ; R25D.1@235.185,70.437 ccw(c235.356,70.391) v1@235.252,70.248 ; R25D.1@235.185,70.437 ccw(c235.356,70.391) v1@235.252,70.248 ; R25D.1@235.185,70.437 ccw(c235.356,70.391) v1@235.252,70.248 ; R25D.1@235.2,70.464 ccw(c235.422,70.405) v1@235.265,70.237 ; R25D.1@235.2,70.464 ccw(c235.422,70.405) v1@235.265,70.237 ; R25D.1@235.2,70.464 ccw(c235.422,70.405) v1@235.265,70.237 ; R25D.1@235.2,70.464 ccw(c235.422,70.405) v1@235.265,70.237 ; R25D.1@235.2,70.464 ccw(c235.422,70.405) v1@235.265,70.237 ; 236.372,67.158 ccw(c236.729,67.158) 236.477,66.906 cw(c236.729,67.158) 236.372,67.158 ; 236.372,67.158 cw(c236.016,67.158) 236.268,66.906 ccw(c236.016,67.158) 236.372,67.158 ; 236.372,67.342 ccw(c236.016,67.342) 236.268,67.594 cw(c236.016,67.342) 236.372,67.342 ; 236.372,67.342 cw(c236.729,67.342) 236.477,67.594 ccw(c236.729,67.342) 236.372,67.342 ; 236.372,68.503 ccw(c236.016,68.503) 236.268,68.755 cw(c236.016,68.503) 236.372,68.503 ; 236.372,68.503 cw(c236.729,68.503) 236.477,68.755 ccw(c236.729,68.503) 236.372,68.503 ; 236.372,68.505 ccw(c236.729,68.505) 236.477,68.253 cw(c236.729,68.505) 236.372,68.505 ; 236.372,68.505 cw(c236.016,68.505) 236.268,68.253 ccw(c236.016,68.505) 236.372,68.505 ; 236.676,79.527 ccw(c236.676,79.884) 236.928,79.632 cw(c236.676,79.884) 236.676,79.527 ; 236.676,79.527 cw(c236.676,79.171) 236.928,79.423 ccw(c236.676,79.171) 236.676,79.527 ; v1@242.645,78.59 cw(c242.337,78.412) 242.681,78.32 ; v1@242.645,78.59 cw(c242.337,78.412) 242.681,78.32 ; v1@242.645,78.59 cw(c242.337,78.412) 242.681,78.32 ; 242.681,78.32 cw(c243.025,78.227) v1@242.847,78.536 ; 242.681,78.32 cw(c243.025,78.227) v1@242.847,78.536 ; 242.681,78.32 cw(c243.025,78.227) v1@242.847,78.536 ; v1@242.699,78.536 cw(c242.521,78.227) 242.865,78.32 ; v1@242.699,78.536 cw(c242.521,78.227) 242.865,78.32 ; v1@242.699,78.536 cw(c242.521,78.227) 242.865,78.32 ; 242.773,78.307 ccw(c242.417,78.307) 242.669,78.559 cw(c242.417,78.307) 242.773,78.307 ; 242.773,78.307 cw(c243.13,78.307) 242.878,78.559 ccw(c243.13,78.307) 242.773,78.307 ; v1(242.773,78.664) ccw(c243.565,78.664) 243.069,78.046 cw(c243.565,78.664) v1(242.773,78.664) ; v1(242.773,78.664) cw(c241.981,78.664) 242.477,78.046 ccw(c241.981,78.664) v1(242.773,78.664) ; 242.865,78.32 cw(c243.21,78.412) v1@242.901,78.59 ; 242.865,78.32 cw(c243.21,78.412) v1@242.901,78.59 ; 242.865,78.32 cw(c243.21,78.412) v1@242.901,78.59 ; 248.25,71.383 cw(c247.877,71.01) 248.369,70.818 ccw(c247.877,71.01) 248.25,71.383 ; 248.506,71.121 ccw(c248.863,71.121) 248.611,70.869 cw(c248.863,71.121) 248.506,71.121 ; 248.506,71.121 cw(c248.15,71.121) 248.402,70.869 ccw(c248.15,71.121) 248.506,71.121 ; 250.103,88.494 ccw(c250.103,88.874) 250.372,88.605 cw(c250.103,88.874) 250.103,88.494 ; 250.103,88.494 cw(c250.103,88.113) 250.372,88.382 ccw(c250.103,88.113) 250.103,88.494 ; 250.115,88.494 ccw(c250.115,88.137) 249.863,88.389 cw(c250.115,88.137) 250.115,88.494 ; 250.115,88.494 cw(c250.115,88.85) 249.863,88.598 ccw(c250.115,88.85) 250.115,88.494 ; 250.823,71.347 ccw(c251.075,71.095) 250.719,71.095 cw(c251.075,71.095) 250.823,71.347 ; 250.823,71.347 cw(c250.571,71.599) 250.571,71.242 ccw(c250.571,71.599) 250.823,71.347 ; CR1.2@254.214,80.742 ccw(c255.41,80.929) v1@254.697,79.951 ; CR1.2@254.214,80.742 ccw(c255.41,80.929) v1@254.697,79.951 ; CR1.2@254.214,80.742 ccw(c255.41,80.929) v1@254.697,79.951 ; CR1.2@254.214,80.742 ccw(c255.41,80.929) v1@254.697,79.951 ; CR1.2@254.214,80.742 ccw(c255.41,80.929) v1@254.697,79.951 ; CR1.2@254.214,80.742 ccw(c255.41,80.929) v1@254.697,79.951 ; 254.229,80.213 ccw(c253.999,80.213) 254.099,80.42 cw(c253.999,80.213) 254.229,80.213 ; 254.229,80.213 cw(c254.459,80.213) 254.358,80.42 ccw(c254.459,80.213) 254.229,80.213 ; 254.229,80.213 v1(254.61,79.832) ; 254.328,80.015 ccw(c254.796,80.088) v1@254.517,79.705 ; 254.328,80.015 ccw(c254.796,80.088) v1@254.517,79.705 ; 254.328,80.015 ccw(c254.796,80.088) v1@254.517,79.705 ; 254.328,80.015 ccw(c254.796,80.088) v1@254.517,79.705 ; 254.328,80.015 ccw(c254.796,80.088) v1@254.517,79.705 ; 254.328,80.015 ccw(c254.796,80.088) v1@254.517,79.705 ; 254.355,80.086 ccw(c254.611,80.341) v1@254.61,79.98 ; 254.355,80.086 ccw(c254.611,80.341) v1@254.61,79.98 ; 254.355,80.086 ccw(c254.611,80.341) v1@254.61,79.98 ; 254.355,80.086 ccw(c254.611,80.341) v1@254.61,79.98 ; 254.355,80.086 ccw(c254.611,80.341) v1@254.61,79.98 ; 254.355,80.086 ccw(c254.611,80.341) v1@254.61,79.98 ; 254.358,80.084 ccw(c254.61,80.336) v1@254.61,79.98 ; 254.358,80.084 cw(c254.106,79.832) v1@254.462,79.832 ; 254.358,80.084 ccw(c254.61,80.336) v1@254.61,79.98 ; 254.358,80.084 cw(c254.106,79.832) v1@254.462,79.832 ; 254.36,80.082 cw(c254.11,79.834) v1@254.462,79.833 ; 254.36,80.082 cw(c254.11,79.834) v1@254.462,79.833 ; 254.36,80.082 cw(c254.11,79.834) v1@254.462,79.833 ; 254.36,80.082 cw(c254.11,79.834) v1@254.462,79.833 ; 254.36,80.082 cw(c254.11,79.834) v1@254.462,79.833 ; 254.36,80.082 cw(c254.11,79.834) v1@254.462,79.833 ; 254.448,80.111 ccw(c254.689,80.251) v1@254.637,79.977 ; 254.448,80.111 cw(c254.207,79.972) v1@254.47,79.881 ; 254.448,80.111 ccw(c254.689,80.251) v1@254.637,79.977 ; 254.448,80.111 cw(c254.207,79.972) v1@254.47,79.881 ; 254.448,80.111 ccw(c254.689,80.251) v1@254.637,79.977 ; 254.448,80.111 cw(c254.207,79.972) v1@254.47,79.881 ; 254.471,80.162 ccw(c254.103,79.999) 254.175,80.395 cw(c254.103,79.999) 254.471,80.162 ; 254.471,80.162 cw(c254.862,80.335) 254.489,80.543 ccw(c254.862,80.335) 254.471,80.162 ; v1(254.61,79.832) cw(c255.05,80.273) 254.494,80.554 ccw(c255.05,80.273) v1(254.61,79.832) ; 259.283,73.304 ccw(c259.553,73.035) 259.215,72.859 cw(c259.553,73.035) 259.283,73.304 ; 259.283,73.304 ccw(c259.283,73.97) 259.845,73.612 cw(c259.283,73.97) 259.283,73.304 ; 259.283,73.304 259.69,73.304 ; 259.69,73.304 cw(c259.438,73.053) 259.739,72.864 ccw(c259.438,73.053) 259.69,73.304 ; 259.69,73.304 259.8,73.194 ; 259.8,73.154 cw(c260.038,73.154) v2@259.995,73.388 ; 259.8,73.154 cw(c260.038,73.154) v2@259.995,73.388 ; 259.8,73.154 cw(c260.038,73.154) v2@259.995,73.388 ; 259.8,73.154 cw(c260.038,73.154) v2@259.995,73.388 ; 260.756,69.215 ccw(c260.423,69.548) 260.832,69.784 cw(c260.423,69.548) 260.756,69.215 ; 260.783,85.801 ccw(c260.783,85.445) 260.531,85.697 cw(c260.783,85.445) 260.783,85.801 ; 260.783,85.801 cw(c260.783,86.158) 260.531,85.906 ccw(c260.783,86.158) 260.783,85.801 ; 260.96,69.501 ccw(c260.603,69.501) 260.855,69.753 cw(c260.603,69.501) 260.96,69.501 ; 260.96,69.501 cw(c261.316,69.501) 261.064,69.753 ccw(c261.316,69.501) 260.96,69.501 ; 261.046,67.059 ccw(c260.69,67.059) 260.942,67.311 cw(c260.69,67.059) 261.046,67.059 ; 261.046,67.059 cw(c261.402,67.059) 261.15,67.311 ccw(c261.402,67.059) 261.046,67.059 ; 263.219,71.095 ccw(c263.219,71.451) 263.471,71.199 cw(c263.219,71.451) 263.219,71.095 ; 263.219,71.095 cw(c263.219,70.738) 263.471,70.99 ccw(c263.219,70.738) 263.219,71.095 ; 263.932,71.095 ccw(c263.932,70.738) 263.68,70.99 cw(c263.932,70.738) 263.932,71.095 ; 263.932,71.095 cw(c263.932,71.451) 263.68,71.199 ccw(c263.932,71.451) 263.932,71.095 ; 274.157,68.305 ccw(c274.514,68.305) 274.262,68.053 cw(c274.514,68.305) 274.157,68.305 ; 274.157,68.305 cw(c273.801,68.305) 274.053,68.053 ccw(c273.801,68.305) 274.157,68.305 ; 274.547,68.883 ccw(c274.799,68.631) 274.442,68.631 cw(c274.799,68.631) 274.547,68.883 ; 274.547,68.883 cw(c274.295,69.135) 274.295,68.778 ccw(c274.295,69.135) 274.547,68.883 ; 275.606,71.435 cw(c275.198,71.027) 275.727,70.798 ccw(c275.198,71.027) 275.606,71.435 ; 275.606,71.435 275.862,71.178 ; 275.862,70.383 ccw(c275.506,70.383) 275.758,70.635 cw(c275.506,70.383) 275.862,70.383 ; 275.862,70.383 cw(c276.219,70.383) 275.967,70.635 ccw(c276.219,70.383) 275.862,70.383 ; 275.862,71.095 ccw(c276.219,71.095) 275.967,70.843 cw(c276.219,71.095) 275.862,71.095 ; 275.862,71.095 cw(c275.506,71.095) 275.758,70.843 ccw(c275.506,71.095) 275.862,71.095 ; 275.862,71.178 cw(c276.335,71.651) 275.677,71.771 ccw(c276.335,71.651) 275.862,71.178 ; 278.915,63.168 ccw(c279.167,62.916) 278.811,62.916 cw(c279.167,62.916) 278.915,63.168 ; 278.915,63.168 cw(c278.663,63.42) 278.663,63.063 ccw(c278.663,63.42) 278.915,63.168 ; 279.018,66.04 ccw(c279.018,66.396) 279.27,66.144 cw(c279.018,66.396) 279.018,66.04 ; 279.018,66.04 cw(c279.018,65.684) 279.27,65.936 ccw(c279.018,65.684) 279.018,66.04 ; 279.654,64.185 ccw(c279.298,64.185) 279.55,64.437 cw(c279.298,64.185) 279.654,64.185 ; 279.654,64.185 cw(c280.01,64.185) 279.758,64.437 ccw(c280.01,64.185) 279.654,64.185 ; v2@232.509,69.441 cw(c232.22,69.152) 232.628,69.152 ccw(c232.22,69.152) v2@232.509,69.441 ; 232.628,69.226 cw(c232.933,69.226) 232.718,69.441 ccw(c232.933,69.226) 232.628,69.226 ; 235.139,71.131 ccw(c235.582,71.131) 235.269,70.818 cw(c235.582,71.131) 235.139,71.131 ; 235.23,71.044 cw(c234.974,70.788) 235.311,70.656 ccw(c234.974,70.788) 235.23,71.044 ; v1@237.411,73.454 cw(c237.195,73.238) 237.5,73.238 ccw(c237.195,73.238) v1@237.411,73.454 ; 237.5,73.166 cw(c237.908,73.166) 237.62,73.454 ccw(c237.908,73.166) 237.5,73.166 ; CR1.2@254.222,80.691 ccw(c254.655,80.473) 254.312,80.13 cw(c254.655,80.473) CR1.2@254.222,80.691 ; CR1.2@254.323,80.415 cw(c253.786,79.982) 254.464,79.859 ccw(c253.786,79.982) CR1.2@254.323,80.415 ; D3B.2@257.182,67.311 cw(c256.955,67.083) 257.277,67.083 ccw(c256.955,67.083) D3B.2@257.182,67.311 ; 257.277,67.034 cw(c257.668,67.034) 257.391,67.311 ccw(c257.668,67.034) 257.277,67.034 ; D3B.2@257.277,67.283 ccw(c258.24,67.283) 257.559,66.602 cw(c258.24,67.283) D3B.2@257.277,67.283 ; U1B.3@259.8,72.77 cw(c260.732,72.77) 260.073,73.429 ccw(c260.732,72.77) U1B.3@259.8,72.77 ; v1@259.867,68.905 ccw(c259.867,69.323) 260.163,69.028 cw(c259.867,69.323) v1@259.867,68.905 ; v1@260.015,68.758 cw(c260.31,68.758) 260.101,68.966 ccw(c260.31,68.758) v1@260.015,68.758 ; v2@260.931,66.703 ccw(c260.655,66.98) 261.046,66.98 cw(c260.655,66.98) v2@260.931,66.703 ; 261.038,69.496 ccw(c260.78,69.754) 261.096,69.936 cw(c260.78,69.754) 261.038,69.496 ; 261.046,66.931 ccw(c261.368,66.931) 261.14,66.703 cw(c261.368,66.931) 261.046,66.931 ; 261.577,85.801 ccw(c261.577,86.504) 262.074,86.007 cw(c261.577,86.504) 261.577,85.801 ; v2@264.614,66.652 ccw(c264.179,67.088) 264.795,67.088 cw(c264.179,67.088) v2@264.614,66.652 ; D1B.2@264.701,67.311 cw(c264.473,67.083) 264.795,67.083 ccw(c264.473,67.083) D1B.2@264.701,67.311 ; 264.795,67.034 cw(c265.186,67.034) 264.91,67.311 ccw(c265.186,67.034) 264.795,67.034 ; D3A.2@274.157,67.943 cw(c274.982,67.943) 274.399,68.526 ccw(c274.982,67.943) D3A.2@274.157,67.943 ; 275.922,71.118 cw(c275.64,70.835) 276.006,70.676 ccw(c275.64,70.835) 275.922,71.118 ; v1@278.028,66.248 cw(c278.028,65.95) 278.239,66.161 ccw(c278.028,65.95) v1@278.028,66.248 ; v1@278.176,66.396 ccw(c278.59,66.396) 278.297,66.103 cw(c278.59,66.396) v1@278.176,66.396
  Top Layer w0.508: D4.1@235.634,103.34 235.634,104.468 v1(235.636,104.47) ; D3C.2@245.999,67.644 v1(245.999,68.732) ; D2C.2@249.768,67.64 249.784,67.625 v2(249.784,66.827) ; D4.1@235.384,103.816 ccw(c234.78,104.42) 235.634,104.42 cw(c234.78,104.42) D4.1@235.384,103.816
  Bottom Layer w0.305: v1(235.164,70.129) 235.164,70.068 v1(236.372,68.859) ; D3D.2@235.407,66.446 236.017,66.446 v1(236.372,66.802) ; v1(262.179,85.903) 262.458,86.182 SWD.10@262.458,87.173 ; SWD.10@262.244,87.049 cw(c261.543,86.644) 262.325,86.435 ; v1@262.318,85.951 cw(c262.97,86.178) 262.372,86.523 ; 262.402,86.724 cw(c262.775,86.624) SWD.10@262.582,86.958 ; D2A.2@277.071,66.243 277.143,66.243 277.296,66.396 v1(278.028,66.396) ; D2A.2@277.392,66.355 ccw(c277.579,66.573) 277.722,66.325 ; 235.989,66.446 ccw(c235.989,66.09) 235.737,66.342 cw(c235.989,66.09) 235.989,66.446 ; 235.989,66.446 cw(c235.989,66.803) 235.737,66.551 ccw(c235.989,66.803) 235.989,66.446 ; 236.064,66.624 ccw(c235.886,66.932) v1@236.23,66.84 ; 236.064,66.624 cw(c236.242,66.315) v1@236.334,66.659 ; 236.064,66.624 ccw(c235.886,66.932) v1@236.23,66.84 ; 236.064,66.624 cw(c236.242,66.315) v1@236.334,66.659 ; 236.064,66.624 ccw(c235.886,66.932) v1@236.23,66.84 ; 236.064,66.624 cw(c236.242,66.315) v1@236.334,66.659 ; 236.12,66.55 ccw(c235.868,66.802) 236.225,66.802 cw(c235.868,66.802) 236.12,66.55 ; 236.12,66.55 cw(c236.372,66.298) 236.372,66.654 ccw(c236.372,66.298) 236.12,66.55 ; 236.12,69.111 ccw(c236.372,69.363) 236.372,69.007 cw(c236.372,69.363) 236.12,69.111 ; 236.12,69.111 cw(c235.868,68.859) 236.225,68.859 ccw(c235.868,68.859) 236.12,69.111 ; v1(236.372,66.802) cw(c235.823,67.352) 235.663,66.591 ccw(c235.823,67.352) v1(236.372,66.802) ; 262.458,86.575 ccw(c261.86,86.575) 262.283,86.998 cw(c261.86,86.575) 262.458,86.575 ; 262.458,86.575 cw(c263.056,86.575) 262.633,86.998 ccw(c263.056,86.575) 262.458,86.575 ; 277.672,66.396 ccw(c277.672,66.752) 277.924,66.5 cw(c277.672,66.752) 277.672,66.396 ; 277.672,66.396 cw(c277.672,66.039) 277.924,66.291 ccw(c277.672,66.039) 277.672,66.396 ; 277.679,66.304 cw(c277.773,65.953) v1@277.955,66.268 ; 277.679,66.304 cw(c277.773,65.953) v1@277.955,66.268 ; 277.679,66.304 cw(c277.773,65.953) v1@277.955,66.268 ; 277.689,66.307 ccw(c277.598,66.644) v1@277.901,66.469 ; 277.689,66.307 ccw(c277.598,66.644) v1@277.901,66.469 ; 277.689,66.307 ccw(c277.598,66.644) v1@277.901,66.469 ; v1@235.312,70.129 ccw(c235.817,70.129) 235.46,69.772 cw(c235.817,70.129) v1@235.312,70.129 ; D3D.2@235.6,66.293 ccw(c235.684,66.694) 235.974,66.404 cw(c235.684,66.694) D3D.2@235.6,66.293 ; v1@262.074,86.007 ccw(c261.148,86.934) 262.458,86.934 cw(c261.148,86.934) v1@262.074,86.007 ; v1@262.29,85.792 ccw(c261.884,86.198) 262.458,86.198 cw(c261.884,86.198) v1@262.29,85.792 ; D2A.2@277.4,66.139 cw(c278.02,65.519) 278.02,66.396 ccw(c278.02,65.519) D2A.2@277.4,66.139
  other v1: 264.566,53.975 236.144,54 240.36,54 245.339,54 253.34,54 258.039,54.026 231.953,54.102 279.476,54.204 271.526,54.229 275.488,54.229 227.914,56.464 231.978,56.49 279.476,57.023 275.463,57.125 258.089,57.175 245.339,57.201 253.34,57.201 264.566,57.201 237.592,57.607 238.836,57.607 236.169,57.633 271.856,58.242 268.961,59.233 230.861,63.043 282.88,63.449 228.905,64.008 243.916,64.592 282.854,66.878 227.99,67.208 271.704,69.571 268.707,70.383 282.854,71.806 257.581,72.263 270.84,72.847 233.655,73.66 268.656,73.66 266.7,73.685 245.872,73.736 246.761,73.736 245.034,73.787 274.168,74.295 275.311,74.295 227.889,74.397 276.9,76.723 282.829,76.937 257.124,78.054 227.914,78.588 257.124,78.943 270.154,79.477 257.099,80.213 271.12,80.493 266.624,80.518 267.462,81.128 257.073,81.407 227.965,81.585 230.708,81.585 266.268,81.636 263.068,81.686 240.106,81.712 236.982,81.763 244.551,81.763 280.264,83.617 282.677,83.617 274.269,83.642 230.657,83.82 227.99,83.845 240.081,83.845 244.5,83.845 247.04,83.845 249.022,85.192 275.438,87.02 237.363,87.071 240.081,87.071 267.284,88.087 267.081,89.052 244.272,89.179 247.599,89.306 272.796,89.332 235.636,89.713 270.434,90.348 243.103,90.983 233.502,92.431 248.437,92.431 276.327,92.964 281.178,92.989 228.6,93.091 249.784,95.123 273.304,95.25 247.98,95.453 263.144,96.85 281.102,97.257 276.327,97.282 238.836,97.46 272.466,97.917 239.522,97.993 267.487,98.527 269.189,100.228 244.018,100.787 251.587,100.838 267.995,101.625 244.018,101.803 245.008,101.803 276.352,102.235 281.102,102.235 250.8,102.514 227.94,103.175 231.343,103.81 250.114,104.953 239.674,105.512 252.628,105.867 227.838,106.147 237.769,106.248 275.336,107.239 281.026,107.239 242.062,107.264 243.103,107.34 239.344,107.848 260.325,108.966 252.705,109.017 254.965,109.017
  other v3: 254.608,87.324 256.108,87.324 257.608,87.324 254.608,88.824 256.108,88.824 257.608,88.824 254.608,90.324 256.108,90.324 257.608,90.324
HPWR: U2.30 U4.16 | length 21.5
  Top Layer w0.152: U4.16@243.725,99.9 243.725,99.453 243.591,99.319 243.591,98.598 244.5,97.688 v2(244.5,96.418) ; v2(245.694,90.653) 245.694,89.611 247.457,87.849 249.403,87.849 ; 249.322,87.849 249.403,87.849 ; U2.30@252.733,87.849 249.403,87.849 ; 252.195,87.849 ccw(c252.195,88.087) 252.363,87.919 cw(c252.195,88.087) 252.195,87.849 ; 252.195,87.849 cw(c252.195,87.61) 252.363,87.779 ccw(c252.195,87.61) 252.195,87.849
  Bottom Layer w0.152: v2(244.5,96.418) 244.5,91.846 v2(245.694,90.653) ; 244.5,95.878 ccw(c243.96,95.878) 244.342,96.26 cw(c243.96,95.878) 244.5,95.878 ; 244.5,95.878 cw(c245.041,95.878) 244.659,96.26 ccw(c245.041,95.878) 244.5,95.878